# Altium PCB Cabinet_System_F.PcbDoc
Units mil, origin at the board's own origin, x right, y up, seen from the top; angles counter-clockwise.
Board outline 3641.26 x 2870.03 mil, 2 copper layers (Top Layer, Bottom Layer); 12 components, 24 nets, 94 pads, 12 vias.
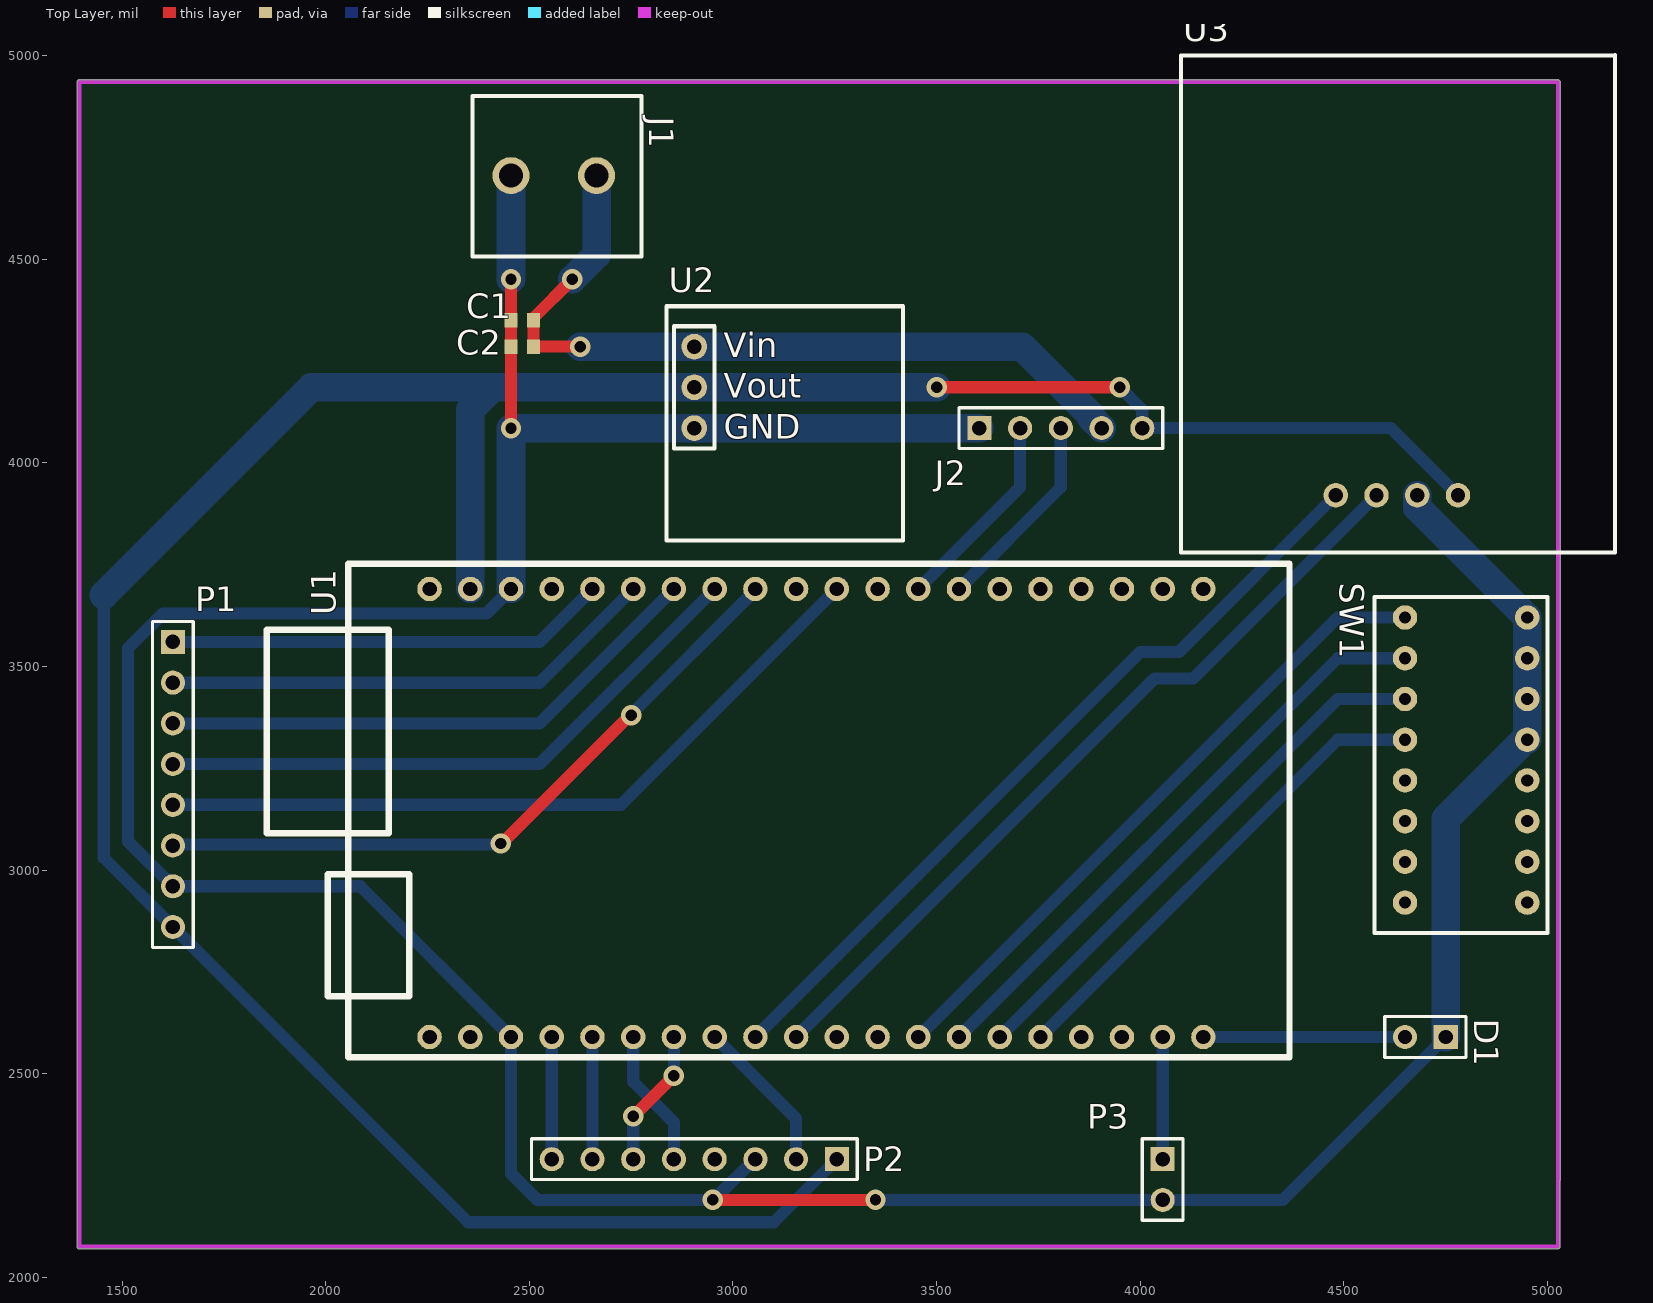
[diagram p0: Top Layer view]
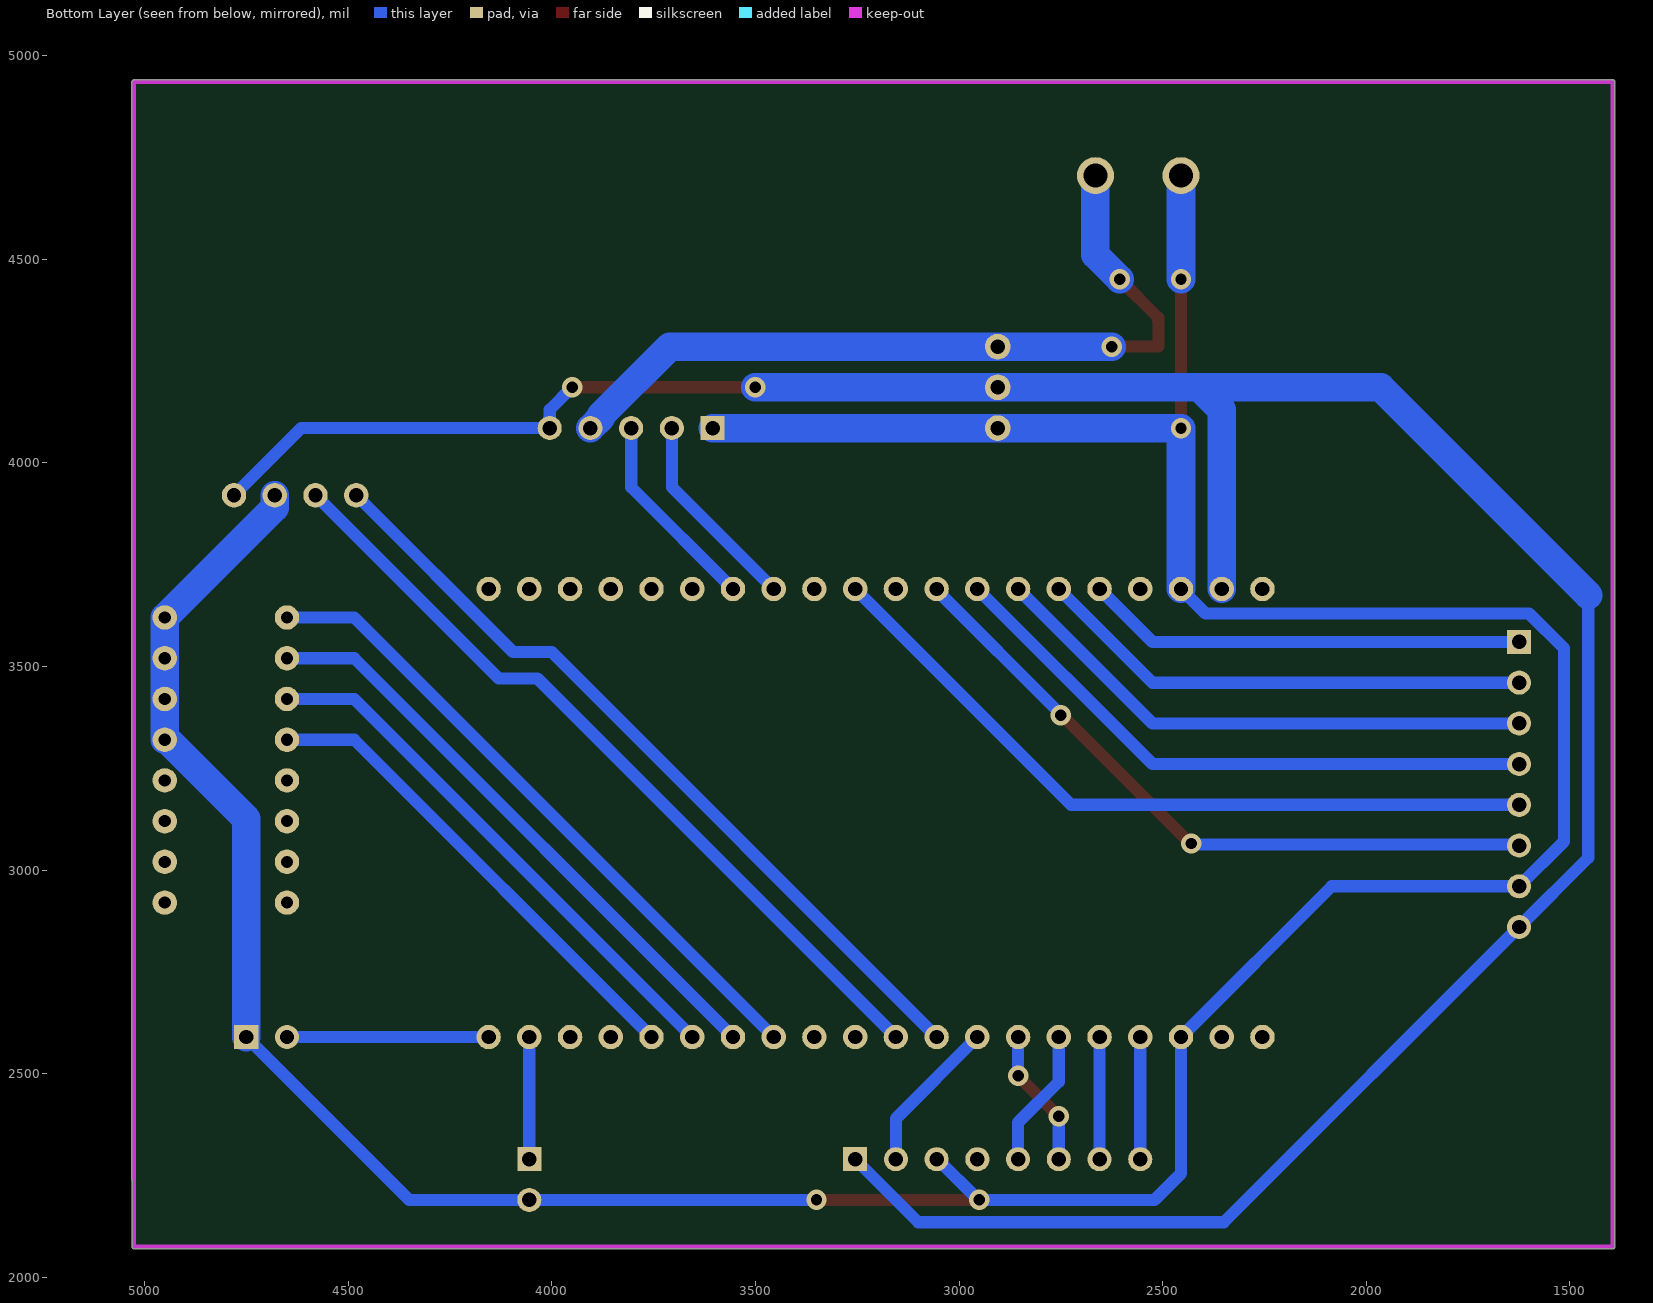
[diagram p1: Bottom Layer view, seen from below]

## Layer stack, top to bottom
Top Solder: solder mask 0.4, Solder Resist, Dk 3.5
Top Layer: signal copper 1.4
Dielectric 1: dielectric 12.6, FR-4, Dk 4.8
Bottom Layer: signal copper 1.4
Bottom Solder: solder mask 0.4, Solder Resist, Dk 3.5

## Board outline
1395,2069.99 cw(c1395,2075) 1389.98,2075 1389.98,4935 cw(c1395,4935) 1395,4940.02 5025,4940.02 cw(c5025,4935) 5028.56,4938.53 5028.55,4938.55 5029.78,4937.32 5029.76,4937.33 cw(c5026.23,4933.77) 5031.24,4933.77 5031.24,2241.23 cw(c5026.23,2241.23) 5030.02,2237.94 5030.02,2075 cw(c5025,2075) 5025,2069.99

## Design rules (kind name [scope] priority, off if disabled: settings)
Clearance [All] p1: gap=10 ignorepadtopadclearanceinfootprint=FALSE except(0: Arc-Hole Track-Hole SMDPad-Hole THPad-Hole Via-Hole Fill-Hole Poly-Hole Region-Hole Text-Hole)
PolygonConnect [All] p1: connectstyle=Relief reliefconductorwidth=10 reliefentries=4 polygonreliefangle="90 Angle" airgapwidth=10
RoutingVias [All] p1: holewidth=28 width=50 viastyle="Through Hole" minholewidth=28 minwidth=50 maxholewidth=28 maxwidth=50
SolderMaskExpansion [All] p1: expansion=4 istentingtop=FALSE
Width [All] p1: maxlimit=70 minlimit=10 preferedwidth=30 minimp=50.000000 maximp=50.000000 favimp=50.000000
30 further rules are at their usual default settings.

## Components (designator, comment, footprint, x,y, rotation, side; value= is the part's Value field where it differs from the comment)
C1 "Cap Semi" 1608[0603] 2482.56,4350 r0 top value=2.2uF
C2 "Cap Semi" 1608[0603] 2482.56,4285 r0 top value=10uF
D1 "STATE LED" HDR1X2 4750,2590 r180 top
J1 "MX128V" MX128V 2665,4705 r270 top
J2 "UART2" HDR1X5 3605,4085 r0 top
P1 "E-PAPER" HDR1X8 1625,3560 r270 top
P2 "RFID" HDR1X8 3255,2290 r180 top
P3 "Light_strp" HDR1X2 4055,2290 r270 top
SW1 "DIPSW" DIPSW 4950,3620 r270 top
U1 "STM32F103" STM32F103 4155.5,2591.18 r90 top
U2 "RT9187" RT9187 2905,4285 r0 top
U3 "ESP12s" ESP12s 4480,3920 r0 top

## Footprints (in the part's own frame and the unit in brackets; to place one, negate y for a bottom-side part, rotate by r counter-clockwise, add the part's x,y. Pads: shape width x height; smd on the part's side, far side on the other; paste and mask are expansions set on the pad)
1608[0603] [mm] "Chip Capacitor, Body 1.6x0.8mm, IPC High Density"
  rect 0.8x0.9 smd: 1(-0.7,0) 2(0.7,0)
  body extent -0.87,-0.48 0.87,0.48, height 1.3
DIPSW [mil]
  round 60 hole 30: 0(0,-300) 1(100,-300) 2(200,-300) 3(300,-300) 4(400,-300) 5(500,-300) 6(600,-300) 7(700,-300) 8(0,0) 9(100,0) 10(200,0) 11(300,0) 12(400,0) 13(500,0) 14(600,0) 15(700,0)
  silkscreen extent -50,-375 775,50
ESP12s [mil]
  round 60 hole 35.43: 0(0,0) 1(100,0) 2(200,0) 3(300,0)
  silkscreen extent -380,-140 685,1080
HDR1X2 [mm] "Connector; Header; 2 Position"
  rect 1.5x1.5 hole 0.9: 1(0,0)
  round 1.5 hole 0.9: 2(2.54,0)
  silkscreen extent -1.27,-1.27 3.81,1.27
HDR1X5 [mm] "Connector; Header; 5 Position"
  rect 1.5x1.5 hole 0.9: 1(0,0)
  round 1.5 hole 0.9: 2(2.54,0) 3(5.08,0) 4(7.62,0) 5(10.16,0)
  silkscreen extent -1.27,-1.27 11.43,1.27
HDR1X8 [mm] "Connector; Header; 8 Position"
  rect 1.5x1.5 hole 0.9: 1(0,0)
  round 1.5 hole 0.9: 2(2.54,0) 3(5.08,0) 4(7.62,0) 5(10.16,0) 6(12.7,0) 7(15.24,0) 8(17.78,0)
  silkscreen extent -1.27,-1.27 19.05,1.27
MX128V [mm]
  round 2.3 hole 1.5: 0(0,0) 1(0,-5.334)
  silkscreen extent -4.95,-7.75 5.05,2.79
RT9187 [mm]
  round 1.6 hole 0.9: 1(0,0) 2(0,-2.54) 3(0,-5.08)
  silkscreen extent -1.72,-12.09 13.01,2.52
STM32F103 [mil]
  round 60 hole 35.43: 0(1098.82,1900.5) 1(1098.82,1800.5) 2(1098.82,1700.5) 3(1098.82,1600.5) 4(1098.82,1500.5) 5(1098.82,1400.5) 6(1098.82,1300.5) 7(1098.82,1200.5) 8(1098.82,1100.5) 9(1098.82,1000.5) 10(1098.82,900.5) 11(1098.82,800.5) 12(1098.82,700.5) 13(1098.82,600.5) 14(1098.82,500.5) 15(1098.82,400.5) 16(1098.82,300.5) 17(1098.82,200.5) 18(1098.82,100.5) 19(1098.82,0.5) 20(-1.18,1900.5) 21(-1.18,1800.5) 22(-1.18,1700.5) 23(-1.18,1600.5) 24(-1.18,1500.5) 25(-1.18,1400.5) 26(-1.18,1300.5) 27(-1.18,1200.5) 28(-1.18,1100.5) 29(-1.18,1000.5) 30(-1.18,900.5) 31(-1.18,800.5) 32(-1.18,700.5) 33(-1.18,600.5) 34(-1.18,500.5) 35(-1.18,400.5) 36(-1.18,300.5) 37(-1.18,200.5) 38(-1.18,100.5) 39(-1.18,0.5)
  silkscreen extent -51,-211 1160,2301

## Part data
C1 C2: "Capacitor (Semiconductor SIM Model)", LatestRevisionDate=29-May-2009, LatestRevisionNote="IPC-7351 Footprint Added.", PackageDescription="Chip Capacitor", PackageReference=C1206, Published=8-Jun-2000, Publisher="Altium Limited"
D1 P3: library part "Header 2", "Header, 2-Pin", LatestRevisionDate=17-Jul-2002, LatestRevisionNote="Re-released for DXP Platform.", Publisher="Altium Limited"
J2: library part "Header 5", "Header, 5-Pin", LatestRevisionDate=17-Jul-2002, LatestRevisionNote="Re-released for DXP Platform.", Publisher="Altium Limited"
P1 P2: library part "Header 8", "Header, 8-Pin", LatestRevisionDate=17-Jul-2002, LatestRevisionNote="Re-released for DXP Platform.", Publisher="Altium Limited"

## Via types
v1: diameter 50, hole 28, Top Layer to Bottom Layer, 12 vias

## Nets (pads, with @x,y where several pads share a name; then routed paths per layer and width w, separated by ;. In a path a pad name is that pad's centre, name@x,y a point inside that pad or via, vN(x,y) a via of type N, cw(c..) or ccw(c..) an arc to the next point about the centre after c; other vN are vias at no path point)
3.3V: J2.5 P1.8 P2.1 U1.1 U2.2 U3.3 | length 7070.1
  Top Layer w30: v1(3500,4185) v1(3950,4185)
  Bottom Layer w30: 1455,3675 1455,3030 P1.8 2350,2135 3100,2135 P2.1 ; v1(3950,4185) 4004.8,4130.2 4004.8,4085.2 J2.5 4615,4085 U3.3
  Bottom Layer w70: 1455,3675 1965,4185 2410,4185 ; U1.1 2355,4130 2410,4185 ; v1(3500,4185) U2.2 2410,4185
5V: C1.2 C2.2 J1.0 J2.4 U2.1 | length 1967
  Top Layer w30: C1.2@2510.12,4351.97 C1.2 ; v1(2605,4450) 2510.87,4355.87 2510.87,4350.75 C1.2 ; v1(2625,4285) C2.2 C1.2
  Bottom Layer w70: v1(2605,4450) 2665,4510 J1.0 ; v1(2625,4285) U2.1 3710.4,4285 3879.53,4115.87 3879.53,4110.47 J2.4
DIP1: SW1.0 U1.32 | length 1621.6
  Bottom Layer w30: U1.32 4485,3620 SW1.0
DIP2: SW1.1 U1.33 | length 1480.2
  Bottom Layer w30: U1.33 4485,3520 SW1.1
DIP3: SW1.2 U1.34 | length 1338.8
  Bottom Layer w30: U1.34 4485,3420 SW1.2
DIP4: SW1.3 U1.35 | length 1197.4
  Bottom Layer w30: U1.35 4485,3320 SW1.3
E-PAPER_BUSY: P1.1 U1.4 | length 1083.8
  Bottom Layer w30: P1.1 2525,3560 U1.4
E-PAPER_CLK: P1.5 U1.10 | length 1849.5
  Bottom Layer w30: P1.5 2725,3160 U1.10
E-PAPER_CS: P1.4 U1.7 | length 1508.1
  Bottom Layer w30: P1.4 2525,3260 U1.7
E-PAPER_DC: P1.3 U1.6 | length 1366.7
  Bottom Layer w30: P1.3 2525,3360 U1.6
E-PAPER_DIN: P1.6 U1.8 | length 1693.9
  Top Layer w30: v1(2430,3065) 2432.5,3065 2747.5,3380 v1(2750,3380)
  Bottom Layer w30: P1.6 1627.5,3062.5 2427.5,3062.5 v1(2430,3065) ; v1(2750,3380) 2750,3382.5 3055,3687.5 U1.8
E-PAPER_RST: P1.2 U1.5 | length 1225.3
  Bottom Layer w30: P1.2 2525,3460 U1.5
GND: C1.1 C2.1 D1.1 J1.1 J2.1 P1.7 P2.3 P3.2 SW1.8 SW1.9 SW1.10 SW1.11 U1.2 U1.22 U2.3 U3.2 | length 9275.8
  Top Layer w30: v1(2455,4085) C2.1 C1.1 v1(2455,4450) ; v1(2950,2190) v1(3350,2190)
  Bottom Layer w30: U1.2 2395,3630 1600.59,3630 1515,3544.41 1515,3070 P1.7 2085,2960 U1.22 2455,2255 2520,2190 v1(2950,2190) 2952.5,2190 3052.5,2290 P2.3 ; v1(3350,2190) P3.2 4350,2190 D1.1
  Bottom Layer w70: U1.2 v1(2455,4085) U2.3 J2.1 ; v1(2455,4450) J1.1 ; U3.2 4680,3890 SW1.8 SW1.9 SW1.10 SW1.11 4943.93,3320 4750,3126.07 D1.1
LED_SIG: P3.1 U1.38 | length 300
  Bottom Layer w30: P3.1 U1.38
RFID_MISO: P2.5 U1.25 | length 341.4
  Bottom Layer w30: U1.25 2755,2480 2855,2380 P2.5
RFID_MOSI: P2.6 U1.26 | length 341.4
  Top Layer w30: v1(2755,2395) v1(2855,2495)
  Bottom Layer w30: P2.6 v1(2755,2395) ; v1(2855,2495) U1.26
RFID_RST: P2.2 U1.27 | length 382.8
  Bottom Layer w30: U1.27 3155,2390 P2.2
RFID_SCK: P2.7 U1.24 | length 300
  Bottom Layer w30: P2.7 U1.24
RFID_SDA: P2.8 U1.23 | length 300
  Bottom Layer w30: P2.8 U1.23
state_LED: D1.2 U1.39 | length 495
  Bottom Layer w30: U1.39 D1.2
UART1_Rx: U1.29 U3.1 | length 1975.9
  Bottom Layer w30: U1.29 4035,3470 4130,3470 U3.1
UART1_Tx: U1.28 U3.0 | length 1975.9
  Bottom Layer w30: U1.28 4000,3535 4095,3535 U3.0
UART2_Rx: J2.2 U1.12 | length 498.6
  Bottom Layer w30: U1.12 3705,3940 J2.2
UART2_Tx: J2.3 U1.13 | length 498.6
  Bottom Layer w30: U1.13 3805,3940 J2.3
pads on no net: P2.4 SW1.4 SW1.5 SW1.6 SW1.7 SW1.12 SW1.13 SW1.14 SW1.15 U1.0 U1.3 U1.9 U1.11 U1.14 U1.15 U1.16 U1.17 U1.18 U1.19 U1.20 U1.21 U1.30 U1.31 U1.36 U1.37

## Keep-outs
Keep-Out Layer:
  lines w10: 1395,2075 5026.23,2075 5026.23,2241.23 5026.23,4933.77 5025,4935 4850,4935 1395,4935 1395,3725 1395,2075

## Text inside footprints (layer, text, board x,y; h text height)
U2: Top Overlay "Vin" at 2977.28,4259.13 h60; Top Overlay "Vout" at 2977.28,4159.13 h60; Top Overlay "GND" at 2977.28,4059.13 h60